# EAGLE board LedTile-1.1 (EAGLE 7.4.0)
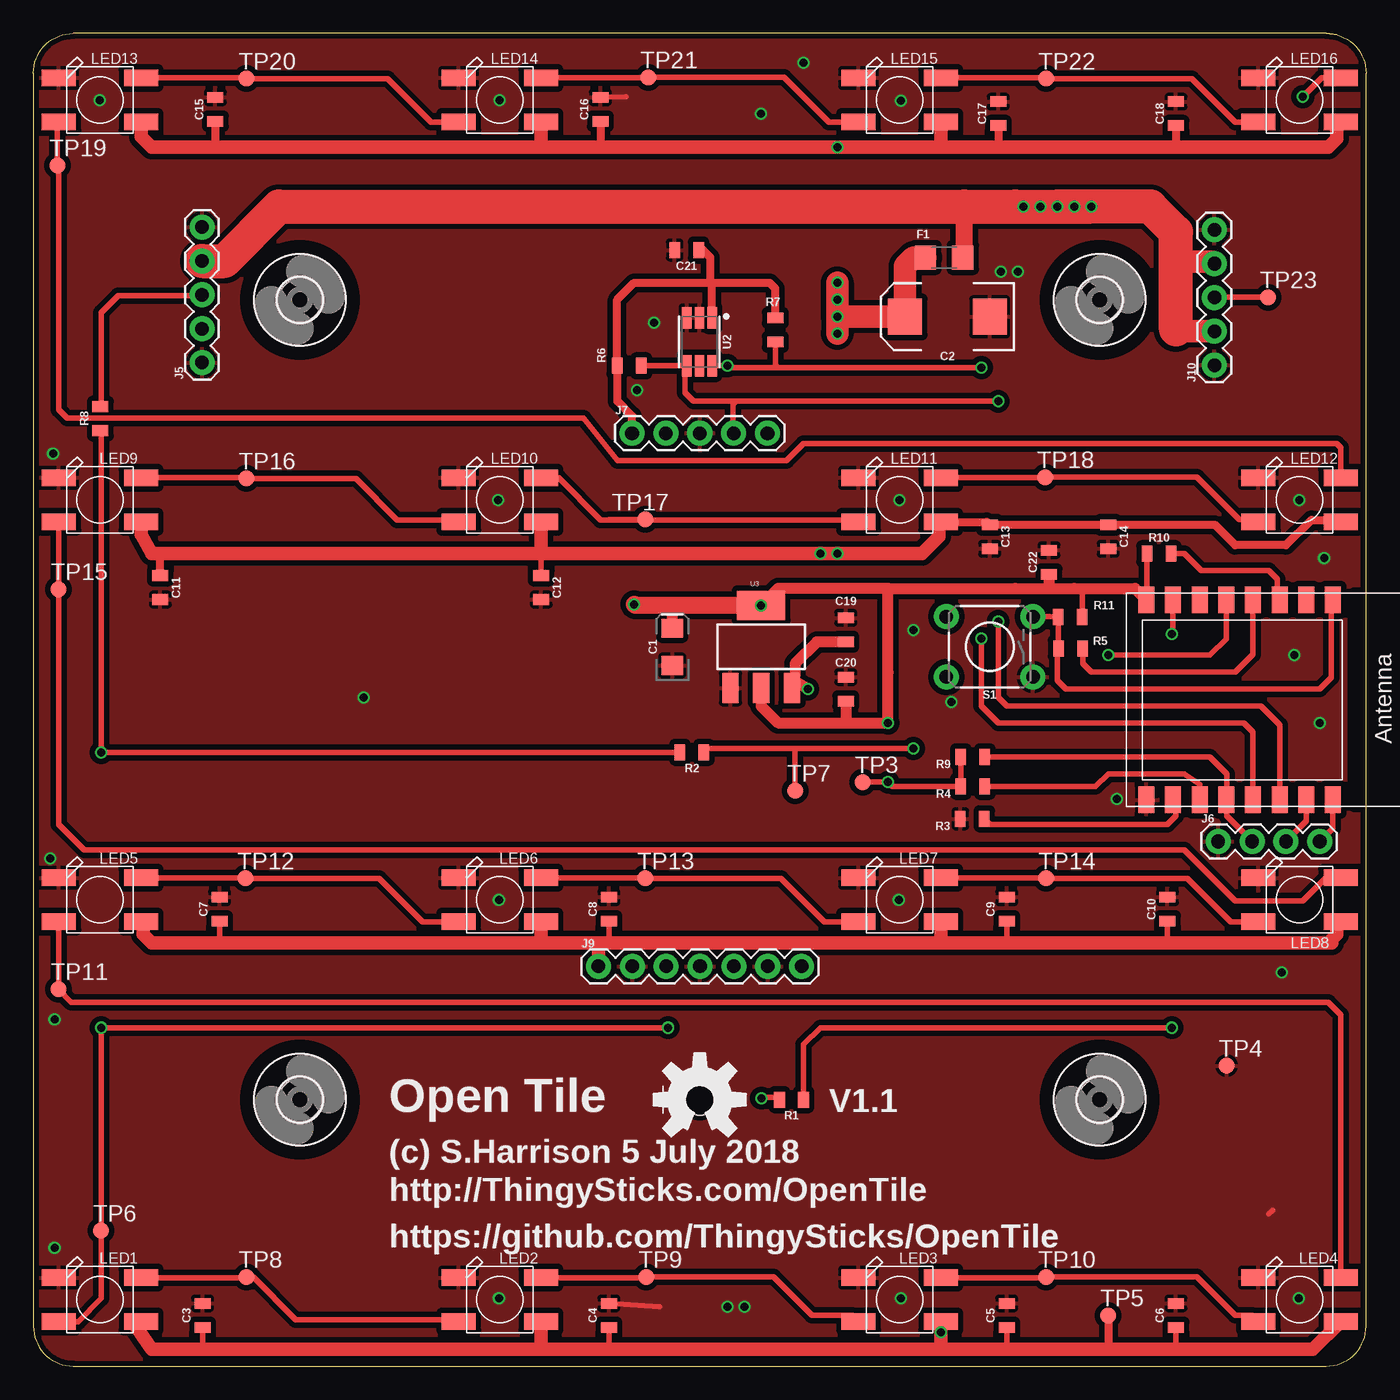
[diagram p0: board, top side]
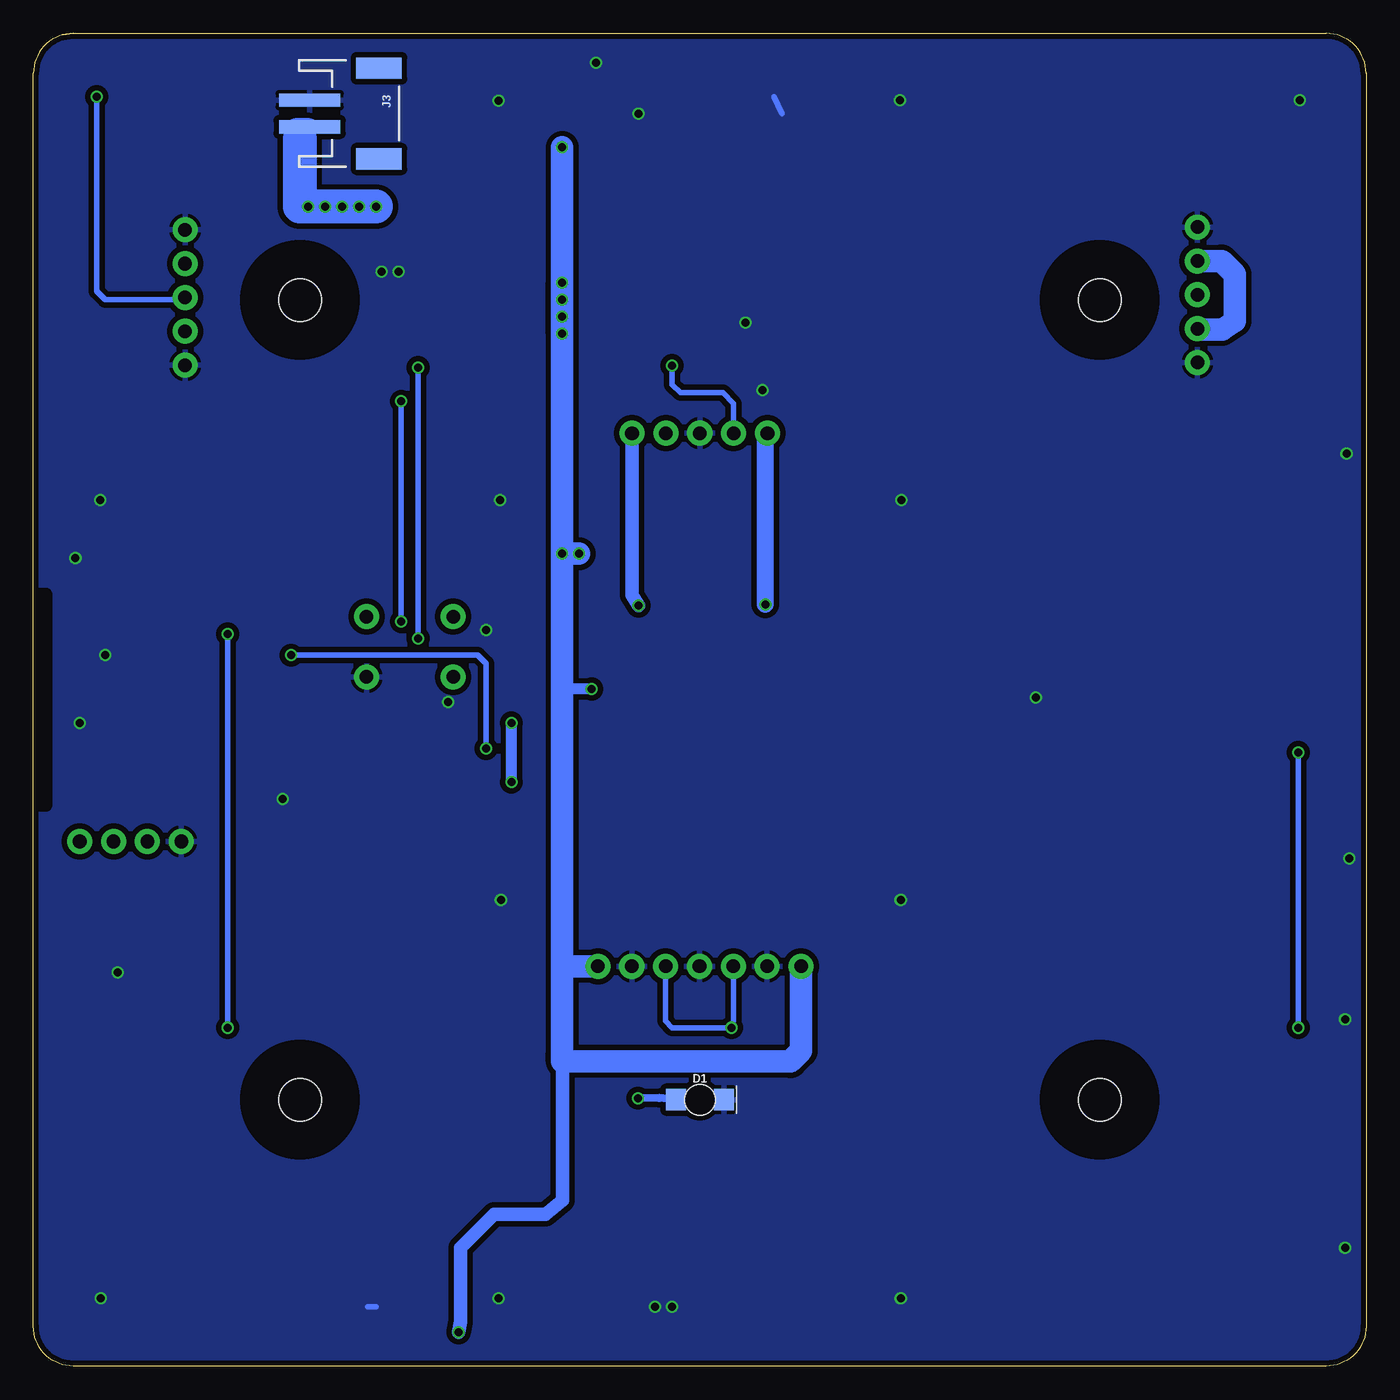
[diagram p1: board, bottom side, seen from below]

Size 100 x 100 mm. Coordinates in mm from the lower left corner, seen from the top.
Outline: 97,100 3,100 arc90 0,97 0,3 arc90 3,0 97,0 arc90 100,3 100,97 arc90 97,100
Outline: 97.8,99.9 97,100
Copper layers (1*16): Top 0.035mm / dielectric 1.5mm / Bottom 0.035mm
Design rules "dirt_cheap_dirty_boards.v1 *": minimum track width 5mil, minimum drill 12mil, track to track 5mil, track to pad 5mil, pad to pad 5mil, via to via 5mil, smd to smd 0mil, copper to edge 10mil, drill to drill 10mil, minimum pad ring 12mil, minimum via ring 6mil, stop-mask expansion 2mil, vias tented up to drill 25mil, thermal gap 10mil

## Footprints (pad centres in the part's own frame; a part is rotated, then mirrored left to right if it is on the bottom)
EIA3216 = smd 1.4 x 1.6: + 1.4,0; - -1.4,0
EIA7343 = smd 2.55 x 2.7: A 3.17,0; C -3.17,0
0805 = smd 0.8 x 1.2: 1 -0.9,0; 2 0.9,0
LED-1206-BOTTOM = smd 1.5 x 1.6: A -1.8,0; C 1.8,0 | hole 2.3: 0,0
1206 = smd 1.6 x 1.8: 1 -1.4,0; 2 1.4,0
3,2 = hole 3.2: 0,0
JST-2-SMD = smd 1 x 4.6: 1 -1,-3.7; 2 1,-3.7 | smd 1.6 x 3.4: NC1 -3.4,1.5; NC2 3.4,1.5
1X05 = drill 1.016 pad 1.88: 1 0,0; 2 2.54,0; 3 5.08,0; 4 7.62,0; 5 10.16,0
1X04 = drill 1.016 pad 1.88: 1 0,0; 2 2.54,0; 3 5.08,0; 4 7.62,0
1X07 = drill 1.016 pad 1.88: 1 0,0; 2 2.54,0; 3 5.08,0; 4 7.62,0; 5 10.16,0; 6 12.7,0; 7 15.24,0
WS2812B-BIGPADS = smd 2.54 x 1.27: 1-VDD 3.085,-1.65; 2-DOUT 3.085,1.65; 3-GND -3.085,1.65; 4-DIN -3.085,-1.65
TACTILE_SWITCH_PTH_6.0MM = drill 1.016 pad 1.88: 1 -3.251,2.261; 2 3.251,2.261; 3 -3.251,-2.261; 4 3.251,-2.261
TP12R = smd 1.2 x 1.2: TP 0,0
TMB-6 = smd 1.6 x 0.7: 1 -1.8,0.95; 2 -1.8,0; 3 -1.8,-0.95; 4 1.8,-0.95; 5 1.8,0; 6 1.8,0.95
SOT223 = smd 1.219 x 2.235: 1 -2.311,-3.099; 2 0,-3.099; 3 2.311,-3.099 | smd 3.6 x 2.2: 4 0,3.099
ESP-12 = smd 2 x 1.2: 1 -7.5,4.5; 2 -7.5,2.5; 3 -7.5,0.5; 4 -7.5,-1.5; 5 -7.5,-3.5; 6 -7.5,-5.5; 7 -7.5,-7.5; 8 -7.5,-9.5; 9 7.5,-9.5; 10 7.5,-7.5; 11 7.5,-5.5; 12 7.5,-3.5; 13 7.5,-1.5; 14 7.5,0.5; 15 7.5,2.5; 16 7.5,4.5

## Placement (x,y rotation side)
C1  10uF  [EIA3216]  47.94,53.98 90 top
C2  100uF  [EIA7343]  68.58,78.74 180 top
C3  1.0uF  [0805]  12.7,3.81 90 top
C4  1.0uF  [0805]  43.18,3.81 90 top
C5  1.0uF  [0805]  73.03,3.81 90 top
C6  1.0uF  [0805]  85.72,3.81 90 top
C7  1.0uF  [0805]  13.97,34.29 90 top
C8  1.0uF  [0805]  43.18,34.29 90 top
C9  1.0uF  [0805]  73.03,34.29 90 top
C10  1.0uF  [0805]  85.09,34.29 90 top
C11  1.0uF  [0805]  9.53,58.42 270 top
C12  1.0uF  [0805]  38.1,58.42 270 top
C13  1.0uF  [0805]  71.75,62.23 270 top
C14  1.0uF  [0805]  80.64,62.23 270 top
C15  1.0uF  [0805]  13.65,94.3 90 top
C16  1.0uF  [0805]  42.55,94.3 90 top
C17  1.0uF  [0805]  72.39,93.98 90 top
C18  1.0uF  [0805]  85.72,93.98 90 top
C19  1.0uF  [0805]  60.96,55.24 90 top
C20  1.0uF  [0805]  60.96,50.8 90 top
C21  0.1uF  [0805]  49.01,83.73 180 top
C22  0.1uF  [0805]  76.2,60.33 90 top
D1  [LED-1206-BOTTOM]  50,20 0 bottom
F1  6V/0.75A  [1206]  68.33,83.19 180 top
FRAME1  FRAME-LETTER  [CREATIVE_COMMONS]  17,-18.93 0 top  (outside the outline)
H1  MOUNT-HOLE3.2  [3,2]  80,80 0 top
H2  MOUNT-HOLE3.2  [3,2]  80,20 0 top
H3  MOUNT-HOLE3.2  [3,2]  20,80 0 top
H4  MOUNT-HOLE3.2  [3,2]  20,20 0 top
J3  [JST-2-SMD]  75.56,93.98 270 bottom
J5  [1X05]  12.65,75.3 90 top
J6  [1X04]  88.9,39.37 0 top
J7  Compute Module  [1X05]  44.92,70 0 top
J9  Compute Module  [1X07]  42.4,30 0 top
J10  [1X05]  88.61,75.1 90 top
LED1  WS2812BBIGPADS  [WS2812B-BIGPADS]  5,5 0 top
LED2  WS2812BBIGPADS  [WS2812B-BIGPADS]  35,5 0 top
LED3  WS2812BBIGPADS  [WS2812B-BIGPADS]  65,5 0 top
LED4  WS2812BBIGPADS  [WS2812B-BIGPADS]  95,5 0 top
LED5  WS2812BBIGPADS  [WS2812B-BIGPADS]  5,35 0 top
LED6  WS2812BBIGPADS  [WS2812B-BIGPADS]  35,35 0 top
LED7  WS2812BBIGPADS  [WS2812B-BIGPADS]  65,35 0 top
LED8  WS2812BBIGPADS  [WS2812B-BIGPADS]  95,35 0 top
LED9  WS2812BBIGPADS  [WS2812B-BIGPADS]  5,65 0 top
LED10  WS2812BBIGPADS  [WS2812B-BIGPADS]  35,65 0 top
LED11  WS2812BBIGPADS  [WS2812B-BIGPADS]  65,65 0 top
LED12  WS2812BBIGPADS  [WS2812B-BIGPADS]  95,65 0 top
LED13  WS2812BBIGPADS  [WS2812B-BIGPADS]  5,95 0 top
LED14  WS2812BBIGPADS  [WS2812B-BIGPADS]  35,95 0 top
LED15  WS2812BBIGPADS  [WS2812B-BIGPADS]  65,95 0 top
LED16  WS2812BBIGPADS  [WS2812B-BIGPADS]  95,95 0 top
LOGO1  OSHW-LOGOL  [OSHW-LOGO-L]  50,20 0 top
R1  [0805]  56.88,20 180 top
R2  500R  [0805]  49.41,46.05 180 top
R3  1k  [0805]  70.44,41.07 180 top
R4  10k  [0805]  70.48,43.5 180 top
R5  [0805]  77.83,53.84 0 top
R6  4k7  [0805]  44.71,75.06 180 top
R7  4k7  [0805]  55.67,77.75 90 top
R8  500R  [0805]  5.04,71.1 90 top
R9  10k  [0805]  70.48,45.72 180 top
R10  10k  [0805]  84.45,60.96 0 top
R11  10k  [0805]  77.79,56.2 0 top
S1  MOMENTARY-SWITCH-SPST-PTH-6.0MM  [TACTILE_SWITCH_PTH_6.0MM]  71.75,53.98 180 top
TP3  TPTP12R  [TP12R]  62.23,43.81 0 top
TP4  TPTP12R  [TP12R]  89.53,22.54 0 top
TP5  TPTP12R  [TP12R]  80.64,3.81 0 top
TP6  TPTP12R  [TP12R]  5.08,10.16 0 top
TP7  TPTP12R  [TP12R]  57.15,43.18 0 top
TP8  TPTP12R  [TP12R]  16,6.7 0 top
TP9  TPTP12R  [TP12R]  46,6.7 0 top
TP10  TPTP12R  [TP12R]  76,6.7 0 top
TP11  TPTP12R  [TP12R]  1.9,28.3 0 top
TP12  TPTP12R  [TP12R]  15.9,36.6 0 top
TP13  TPTP12R  [TP12R]  45.9,36.6 0 top
TP14  TPTP12R  [TP12R]  76,36.6 0 top
TP15  TPTP12R  [TP12R]  1.9,58.3 0 top
TP16  TPTP12R  [TP12R]  16,66.6 0 top
TP17  TPTP12R  [TP12R]  45.9,63.52 0 top
TP18  TPTP12R  [TP12R]  75.9,66.7 0 top
TP19  TPTP12R  [TP12R]  1.8,90.1 0 top
TP20  TPTP12R  [TP12R]  16,96.6 0 top
TP21  TPTP12R  [TP12R]  46.13,96.7 0 top
TP22  TPTP12R  [TP12R]  76,96.6 0 top
TP23  TPTP12R  [TP12R]  92.62,80.2 0 top
U2  TSL2561T  [TMB-6]  49.98,76.86 270 top
U3  [SOT223]  54.61,53.98 0 top
X1  [ESP-12]  93,50 270 top

## Library data of the parts
C1 = SparkFun-Capacitors; PROD_ID: CAP-00811
C2 = SparkFun-Capacitors; PROD_ID: CAP-07890
C3-C22 = SparkFun-Capacitors; PROD_ID: CAP-11625
D1 = SparkFun-LED
F1 = SparkFun-Fuses; PROD_ID: RES-11150
FRAME1 = SparkFun-Aesthetics
H1-H4 = holes
J3 = SparkFun-Connectors; PROD_ID: CONN-11443
J5 J7 J9 J10 = SparkFun-Connectors
J6 = SparkFun-Connectors; PROD_ID: CONN-09696
LED1-LED16 = ThingySticks
LOGO1 = Spark
R1-R11 = SparkFun-Resistors
S1 = SparkFun-Switches; PROD_ID: SWCH-08441; SF_SKU: COM-00097
TP3-TP23 = testpad
U2 = SparkFun-Sensors
U3 = SparkFun-IC-Power; PROD_ID: VREG-08170
X1 = adafruit

## Nets
5V: C2.A C3.1 C4.1 C5.1 C6.1 C7.1 C8.1 C9.1 C10.1 C11.1 C12.1 C13.1 C14.1 C15.1 C16.1 C17.1 C18.1 C19.1 F1.2 J9.1 J9.7 LED1.1-VDD LED2.1-VDD LED3.1-VDD LED4.1-VDD LED5.1-VDD LED6.1-VDD LED7.1-VDD LED8.1-VDD LED9.1-VDD LED10.1-VDD LED11.1-VDD LED12.1-VDD LED13.1-VDD LED14.1-VDD LED15.1-VDD LED16.1-VDD TP5.TP U3.3
+3V3: C1.+ C20.1 C21.1 C22.1 J7.1 J7.5 R4.2 R6.2 R7.2 R9.2 R10.1 R11.2 TP3.TP U2.1 U3.2 U3.4 X1.8
CH_PD: R10.2 X1.3
D0: J6.2 R9.1 X1.12
GND: C1.- C2.C C3.2 C4.2 C5.2 C6.2 C7.2 C8.2 C9.2 C10.2 C11.2 C12.2 C13.2 C14.2 C15.2 C16.2 C17.2 C18.2 C19.2 C20.2 C21.2 C22.2 D1.C J3.1 J5.1 J5.5 J6.1 J7.3 J9.2 J9.4 J9.6 J10.1 J10.5 LED1.3-GND LED2.3-GND LED3.3-GND LED4.3-GND LED5.3-GND LED6.3-GND LED7.3-GND LED8.3-GND LED9.3-GND LED10.3-GND LED11.3-GND LED12.3-GND LED13.3-GND LED14.3-GND LED15.3-GND LED16.3-GND R3.2 S1.1 TP4.TP U2.2 U2.3 U3.1 X1.9
LEDS_DATA: R2.1 TP7.TP X1.5
LEDS_DIN: J9.3 J9.5 LED1.4-DIN R2.2 R8.1 TP6.TP
LEDS_DOUT: J10.3 LED16.2-DOUT TP23.TP
N$4: LED1.2-DOUT LED2.4-DIN TP8.TP
N$6: J5.3 R8.2
N$19: R3.1 X1.10
N$20: R4.1 X1.11
N$21: LED2.2-DOUT LED3.4-DIN TP9.TP
N$22: LED3.2-DOUT LED4.4-DIN TP10.TP
N$23: LED4.2-DOUT LED5.4-DIN TP11.TP
N$24: R5.2 X1.4
N$26: D1.A R1.2
N$27: LED8.2-DOUT LED9.4-DIN TP15.TP
N$28: LED12.2-DOUT LED13.4-DIN TP19.TP
N$29: LED5.2-DOUT LED6.4-DIN TP12.TP
N$30: LED6.2-DOUT LED7.4-DIN TP13.TP
N$31: LED7.2-DOUT LED8.4-DIN TP14.TP
N$32: LED9.2-DOUT LED10.4-DIN TP16.TP
N$33: LED10.2-DOUT LED11.4-DIN TP17.TP
N$34: LED11.2-DOUT LED12.4-DIN TP18.TP
N$35: LED13.2-DOUT LED14.4-DIN TP20.TP
N$36: LED14.2-DOUT LED15.4-DIN TP21.TP
N$37: LED15.2-DOUT LED16.4-DIN TP22.TP
OSH_LED: R1.1 X1.7
RESET: R5.1 R11.1 S1.3 X1.1
RX: J6.3 X1.15
SCL: J7.4 R6.1 U2.4 X1.14
SDA: J7.2 R7.1 U2.6 X1.13
TX: J6.4 X1.16
VIN: F1.1 J3.2 J5.2 J5.4 J10.2 J10.4

## Tracks (layer width: path | path; a pad name or v marks a point on that pad's centre or on a via)
5V  (via drill 0.6)
  Top 0.406: 97.3,63.5 97.94,63.5 LED12.1-VDD | C6.1 85.72,1.27 | C12.1 38.1,60.96 | C5.1 73.03,1.27 | C4.1 43.18,1.27 | C3.1 12.7,1.27 | C10.1 85.09,31.75 | C9.1 73.03,31.75 | C8.1 43.18,31.75 | C7.1 13.97,31.75
  Top 0.61: 97.3,63.5 95.89,63.5 93.98,61.59 90.17,61.59 88.64,63.13 C14.1 C13.1 71.53,63.35 LED11.1-VDD | TP5.TP 80.64,1.27 | C16.1 42.55,91.44 | C15.1 13.65,91.76 13.34,91.44 | C17.1 72.39,91.44 | C18.1 85.72,91.44 | C11.1 9.53,60.96
  Top 0.813: v58.1,50.8 56.92,51.52 U3.3 57.15,51.92 | C19.1 58.79,54.34 57.15,52.7 57.15,51.92 | 57.15,51.44 57.15,51.92
  Top 1.016: 67.94,1.27 73.03,1.27 80.64,1.27 85.72,1.27 96,1.27 LED4.1-VDD | 38.1,1.27 12.7,1.27 8.89,1.27 7.45,3.35 LED1.1-VDD | 38.1,31.75 13.97,31.75 8.89,31.75 8.26,32.38 8.26,33.18 LED5.1-VDD | 38.1,31.75 42.55,31.75 | 42.55,31.75 43.18,31.75 67.94,31.75 | 67.94,31.75 73.03,31.75 85.09,31.75 97.42,31.75 97.42,32.02 97.79,32.38 97.79,33.05 LED8.1-VDD | 38.1,60.96 9.53,60.96 8.89,60.96 8.09,62.4 LED9.1-VDD | 38.1,60.96 v59.05,60.96 v60.33,60.96 66.67,60.96 67.94,62.23 67.94,63.21 LED11.1-VDD 67.8,63.35 | v60.33,91.44 59.05,91.44 | v60.33,91.44 67.94,91.44 | 67.94,91.44 72.39,91.44 85.72,91.44 97.16,91.44 97.79,92.08 97.79,93.06 LED16.1-VDD | 67.94,1.27 43.18,1.27 38.1,1.27 | 67.94,1.27 68.08,1.41 v68.08,2.54 LED3.1-VDD | LED2.1-VDD 38.09,1.28 38.1,1.27 | LED6.1-VDD 38.09,31.77 38.1,31.75 | LED7.1-VDD 68.08,31.89 67.94,31.75 | LED10.1-VDD 38.09,61.61 38.1,60.96 | LED15.1-VDD 68.08,91.58 67.94,91.44 | LED13.1-VDD 8.09,92.25 8.89,91.44 13.34,91.44 38.1,91.44 | 38.1,91.44 42.55,91.44 v60.33,91.44 | LED14.1-VDD 38.09,91.45 38.1,91.44 | J9.1 42.4,31.61 42.55,31.75
  Top 1.676: v60.33,77.47 v60.33,81.28 v60.33,80.01 v60.33,78.74 C2.A 65.41,82.55 66.04,83.19 F1.2
  Bottom 0.813: v58.1,50.8 60.33,50.8
  Bottom 1.016: v68.08,2.54 67.94,3.31 67.94,8.89 65.43,11.4 61.57,11.4 60.3,12.44 60.3,22.25 59.69,22.86
  Bottom 1.676: v60.33,77.47 v60.33,81.28 v60.33,80.01 v60.33,78.74 | v60.33,78.74 v60.33,60.96 | v60.33,60.96 60.33,50.8 60.33,31.75 60.32,29.84 | 60.32,29.84 60.31,23.49 60.31,22.86 59.69,22.86 43.18,22.86 42.4,23.64 J9.1 | v60.33,60.96 v59.05,60.96 | v60.33,91.44 v60.33,78.74 | J9.7 60.17,30 60.32,29.84
+3V3  (via drill 0.6)
  Top 0.406: 64.33,43.62 v64.14,43.81 | TP3.TP v64.14,43.81 | 73.48,58.16 73.66,58.34 | 76.34,58.2 76.2,58.34 | v64.14,43.81 64.45,43.5 R4.2 R9.2 | R11.2 78.69,58.29 78.11,58.34 | R10.1 83.56,58.16 83.19,57.78 83.19,57.81 X1.8
  Top 0.61: 64.14,50.8 64.14,52.07 | J7.1 44.92,71.28 43.81,72.39 R6.2 43.81,80 45.09,81.28 50.8,81.28 | 50.8,81.28 55.24,81.28 55.67,80.86 R7.2 | U2.1 50.92,81.16 50.8,81.28 | C21.1 50.25,83.73 50.8,83.19 50.8,81.28
  Top 0.813: 64.14,58.34 73.66,58.34 76.2,58.34 | 76.2,58.34 78.11,58.34 82.66,58.34 X1.8 | 64.14,58.34 64.14,52.07 v64.14,48.26 60.96,48.26 | U3.2 54.61,49.53 55.88,48.26 60.96,48.26 | C20.1 60.96,48.26 | 64.14,58.34 55.88,58.34 U3.4 | C1.+ 47.94,56.76 47.62,57.07 | C22.1 76.2,58.34
  Top 1.27: U3.4 47.62,57.07 45.16,57.07 v45.09,57.15
  Bottom 0.813: v64.14,43.81 v64.14,48.26
  Bottom 1.016: J7.5 55.08,57.87 U3.4
  Bottom 1.27: v45.09,57.15 45.09,69.83 J7.1
  other vias: 54.61,57.07
CH_PD
  Top 0.406: 93.34,57.15 93.34,57.34 X1.3 93.34,57.66 93.34,59.05 92.71,59.69 87.63,59.69 86.36,60.96 R10.2
D0
  Top 0.406: J6.2 89.53,41.27 89.53,42.47 X1.12 89.53,42.53 89.53,44.45 88.27,45.72 R9.1
GND  (via drill 0.6)
  Top 0.406: C16.2 44.45,95.25 | 92.97,11.7 92.71,11.43 | C4.2 46.99,4.45
  Top 0.61: 81.39,42.66 v81.28,42.55
  Bottom 0.406: 44.45,95.25 43.81,93.98 | 74.93,4.45 74.3,4.45
  other vias: 34.92,5.08 65.09,5.08 65.09,94.93 24.77,50.16 1.27,38.1 68.9,49.85 94.61,53.34 57.78,97.79 66.04,55.24 34.92,34.98 64.92,34.98 94.97,64.98 64.97,64.98 34.88,64.98 1.48,68.48 4.97,94.98 34.98,94.98 46.58,78.3 45.3,73.22 93.66,29.53 1.59,8.89 1.59,26.04 96.84,60.64 72.61,82.11 73.88,82.11 94.93,5.08 54.61,93.98 96.52,48.26 53.34,4.45 52.07,4.45
  pour Bottom (isolate 0.406, rank 4): -0.64,0 99.69,0 101.6,1.91 101.6,99.06 99.06,101.6 2.54,101.6 -1.91,97.16 -1.91,2.54
  pour Top (isolate 0.406, rank 4): -0.1,100.1 100.3,100.2 100.4,0 0,-0.1
LEDS_DATA  (via drill 0.6)
  Top 0.406: X1.5 89.5,54.58 88.27,53.34 v80.64,53.34 | v66.04,46.35 57.15,46.35 | 57.15,46.35 50.62,46.35 R2.1 | TP7.TP 57.15,46.35
  Bottom 0.406: v80.64,53.34 66.67,53.34 66.04,52.7 v66.04,46.35
LEDS_DIN  (via drill 0.6)
  Top 0.406: R8.1 5.08,70.16 v5.08,46.04 5.38,46.05 R2.2 | v47.62,25.4 v5.08,25.4 TP6.TP 5.08,5.08 3.35,3.35 LED1.4-DIN
  Bottom 0.406: v5.08,25.4 v5.08,46.04 | J9.3 47.48,25.89 v47.62,25.4 52.07,25.4 52.56,25.89 J9.5
LEDS_DOUT  (via drill 0.6)
  Top 0.305: 98.93,96.65 99.06,96.52 | 88.78,80.01 J10.3
  Top 0.406: v95.25,95.25 96.65,96.65 LED16.2-DOUT 98.93,96.65 | TP23.TP 88.64,80.2 J10.3
  Bottom 0.406: v95.25,95.25 95.25,80.64 94.61,80.01 88.78,80.01 J10.3
N$4
  Top 0.406: LED1.2-DOUT 15.95,6.65 TP8.TP 16.48,6.7 19.68,3.49 31.77,3.49 LED2.4-DIN
N$6
  Top 0.406: R8.2 5.01,72 5.08,72.39 5.08,79.06 6.35,80.33 11.65,80.33 J5.3
N$19
  Top 0.406: R3.1 71.64,40.76 71.75,40.64 85.09,40.64 85.72,41.27 85.72,42.27
  Top 0.61: 85.72,42.27 X1.10
N$20
  Top 0.406: X1.11 87.5,43.63 86.36,44.45 80.64,44.45 79.69,43.5 R4.1
N$21
  Top 0.406: LED2.2-DOUT 45.95,6.65 TP9.TP 55.53,6.7 58.42,3.81 61.45,3.81 LED3.4-DIN 61.74,3.17
N$22
  Top 0.406: LED3.2-DOUT 75.95,6.65 TP10.TP 87.28,6.7 90.17,3.81 91.45,3.81 LED4.4-DIN
N$23
  Top 0.406: LED4.2-DOUT 98.08,7.33 98.11,6.99 98.11,26.35 97.16,27.3 2.86,27.3 1.86,28.3 TP11.TP 1.9,33.34 LED5.4-DIN
N$24
  Top 0.406: X1.4 91.5,53.4 90.17,52.07 79.38,52.07 78.74,52.7 R5.2
N$26  (via drill 0.6)
  Top 0.406: R1.2 55.8,20.18 54.71,20.18 v54.64,20.11
  Bottom 0.61: D1.A 53.04,20.11 v54.64,20.11
N$27
  Top 0.406: LED8.2-DOUT 96.97,36.65 95.25,34.92 90.17,34.92 86.36,38.73 3.81,38.73 1.91,40.64 TP15.TP 1.9,63.34 LED9.4-DIN
N$28
  Top 0.406: LED12.2-DOUT 98.08,68.92 97.79,69.22 57.78,69.22 56.52,67.94 43.81,67.94 41.27,71.12 2.54,71.12 1.91,71.75 1.91,90 TP19.TP 1.8,93.23 LED13.4-DIN
N$29
  Top 0.406: LED5.2-DOUT 15.85,36.65 TP12.TP 25.95,36.6 29.21,33.34 31.9,33.34 LED6.4-DIN
N$30
  Top 0.406: LED6.2-DOUT 45.85,36.65 TP13.TP 56.11,36.6 59.37,33.34 61.9,33.34 LED7.4-DIN
N$31
  Top 0.406: LED7.2-DOUT 75.95,36.65 TP14.TP 86.59,36.6 89.85,33.34 91.9,33.34 LED8.4-DIN
N$32
  Top 0.406: LED9.2-DOUT 15.95,66.65 TP16.TP 24.2,66.6 27.3,63.5 31.77,63.5 LED10.4-DIN
N$33
  Top 0.406: LED10.2-DOUT 39.4,66.65 42.55,63.5 43.18,63.5 | 43.18,63.5 61.77,63.5 LED11.4-DIN | TP17.TP 43.2,63.52 43.18,63.5
N$34
  Top 0.406: LED11.2-DOUT 75.85,66.65 TP18.TP 87.29,66.7 87.31,66.67 90.49,63.51 LED12.4-DIN
N$35
  Top 0.406: LED13.2-DOUT 15.95,96.65 TP20.TP 26.59,96.6 29.84,93.34 LED14.4-DIN
N$36
  Top 0.406: LED14.2-DOUT 46.09,96.65 TP21.TP 56.34,96.7 59.69,93.34 LED15.4-DIN
N$37
  Top 0.406: LED15.2-DOUT 75.95,96.65 TP22.TP 86.92,96.6 90.17,93.34 LED16.4-DIN
OSH_LED  (via drill 0.6)
  Top 0.406: X1.7 85.5,55.02 v85.41,54.93 | v85.41,25.4 59.05,25.4 57.78,24.13 57.78,20.29
  Top 0.61: 57.78,20.29 R1.1
  Bottom 0.406: v85.41,54.93 v85.41,25.4
RESET
  Top 0.406: 97.38,57.62 97.38,51.66 96.52,50.8 77.47,50.8 76.83,51.44 76.83,53.75 R5.1 76.89,53.88 R11.1 76.21,56.24 S1.3
  Top 0.61: 97.38,57.62 X1.1
RX
  Top 0.406: X1.15 95.5,40.89 J6.3
SCL  (via drill 0.6)
  Top 0.406: R6.1 U2.4 48.9,74.93 48.9,73.03 49.53,72.39 52.7,72.39 | J7.4 52.5,70.04 52.5,72.19 52.7,72.39 | X1.14 93.5,48.1 92.08,49.53 73.03,49.53 72.39,50.16 v72.39,55.88 | v72.39,72.39 52.7,72.39
  Bottom 0.406: v72.39,55.88 72.39,71.12 v72.39,72.39
SDA  (via drill 0.6)
  Top 0.406: U2.6 v52.07,75.06 52.2,74.93 55.88,74.93 | R7.1 55.67,75.14 55.88,74.93 | X1.13 91.5,47.56 90.81,48.26 72.39,48.26 71.12,49.53 v71.12,54.61 | v71.12,74.93 55.88,74.93
  Bottom 0.406: J7.2 47.46,72.22 48.26,73.03 51.44,73.03 52.07,73.66 v52.07,75.06 | v71.12,54.61 v71.12,74.93
TX
  Top 0.406: X1.16 97.5,40.35 J6.4
VIN  (via drill 0.6)
  Top 1.27: F1.1 69.85,83.19 69.85,87 | 73.66,87 v74.3,87 v76.83,87
  Top 1.676: J10.2 85.87,77.64 85.72,77.79 | 85.72,83.19 86.04,82.87 88.47,82.87 J10.4
  Top 2.54: J5.4 14.34,82.92 18.41,87 69.85,87 73.66,87 v76.83,87 | v76.83,87 v79.38,87 | 85.72,77.79 85.72,83.19 85.72,85.09 83.82,87 v76.83,87
  Bottom 1.27: J3.2 80.38,92.98 80.01,92.71 80.01,92.08
  Bottom 1.676: J5.4 10.85,82.92 9.84,81.92 9.84,78.42 10.79,77.79 12.39,77.79 J5.2
  Bottom 2.54: v74.3,87 v75.56,87 v76.83,87 v78.11,87 v79.38,87 80.01,87 80.01,92.08

## Text on the board
tNames: Open Tile | V1.1 | (c) S.Harrison 5 July 2018 | http://ThingySticks.com/OpenTile | https://github.com/ThingySticks/OpenTile